# EAGLE board Battery Display Board (EAGLE 8.2.1)
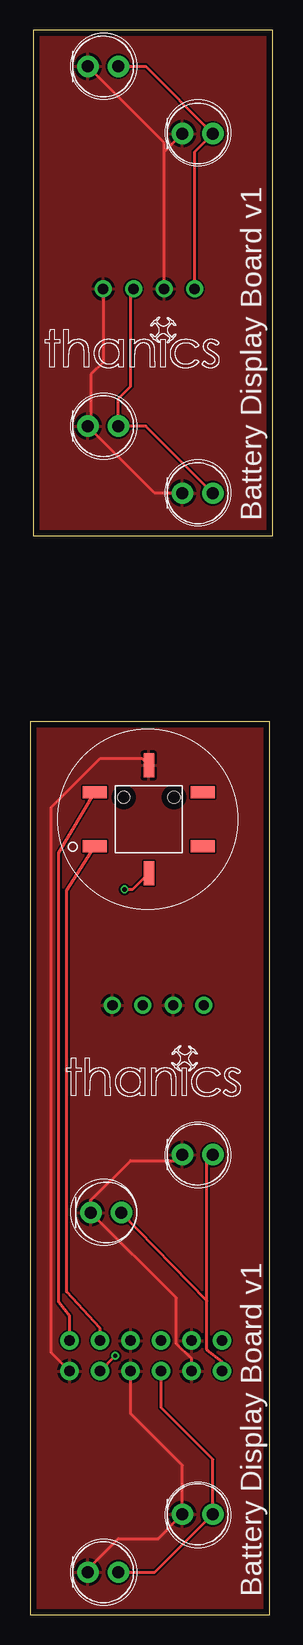
[diagram p0: board, top side]
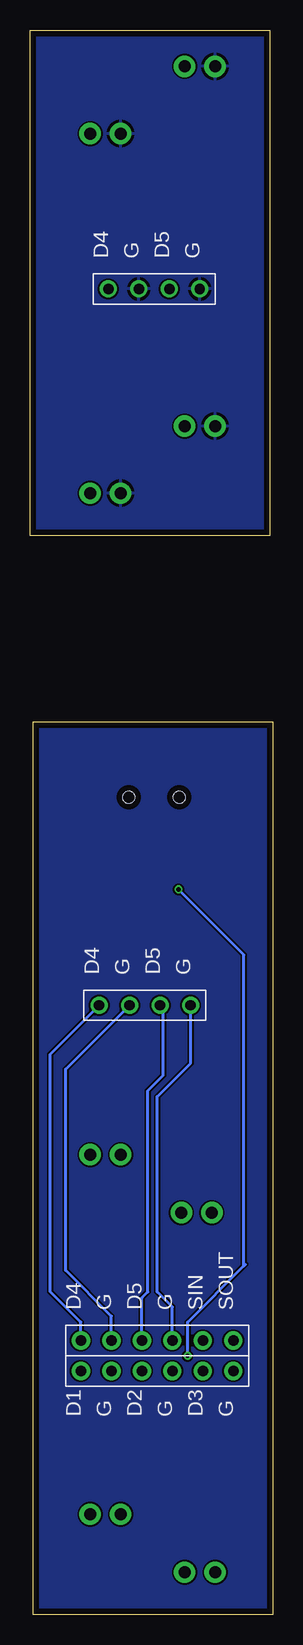
[diagram p1: board, bottom side, seen from below]

Size 20.24 x 132.07 mm. Coordinates in mm from the lower left corner, seen from the top.
Outline: 0,0 19.99,0 19.99,74.41 0,74.41 0,0
Outline: 0.25,89.92 20.24,89.92 20.24,132.07 0.25,132.07 0.25,89.92
Copper layers (1*16): Top 0.035mm / dielectric 1.6mm / Bottom 0.035mm
Design rules "Elecrow_2-layer_PCB_eagle_rule": minimum track width 6mil, minimum drill 12mil, track to track 6mil, track to pad 6mil, pad to pad 6mil, via to via 8mil, smd to smd 0mil, copper to edge 20mil, drill to drill 10mil, minimum pad ring 6mil, minimum via ring 6mil, stop-mask expansion 0mil, vias tented up to drill 100mil, thermal gap 10mil

## Footprints (pad centres in the part's own frame; a part is rotated, then mirrored left to right if it is on the bottom)
5MM_LED = drill 1 pad 1.778: A 1.27,0; C -1.27,0
LED_TACT_SWITCH = smd 1.999 x 1.001: 1 4.496,2.261; 2 -4.496,2.261; 3 4.496,-2.261; 4 -4.496,-2.261 | smd 0.889 x 1.999: 5 0,-4.496; 6 0,4.496 | hole 0.991: -2.095,-1.854; 2.095,-1.854
12_PIN_RIBBON_CONNECTOR = drill 0.87 pad 1.524: P$1 -1.27,6.35; P$2 -1.27,3.81; P$3 -1.27,1.27; P$4 -1.27,-1.27; P$5 -1.27,-3.81; P$6 -1.27,-6.35; P$7 1.27,6.35; P$8 1.27,3.81; P$9 1.27,1.27; P$10 1.27,-1.27; P$11 1.27,-3.81; P$12 1.27,-6.35
4_PIN_RIBBON_CONNECTOR = drill 0.87 pad 1.422: P$1 0,3.81; P$2 0,1.27; P$3 0,-1.27; P$4 0,-3.81

## Placement (x,y rotation side)
U$1  VAOL-5LSBY2_BLUE_LED  [5MM_LED]  6.35,33.53 0 top
U$2  LED_TACT_SWITCH  [LED_TACT_SWITCH]  9.91,66.29 180 top
U$3  VAOL-5LSBY2_BLUE_LED  [5MM_LED]  13.97,38.35 0 top
U$4  VAOL-5LSBY2_BLUE_LED  [5MM_LED]  13.97,8.38 0 top
U$5  VAOL-5LSBY2_BLUE_LED  [5MM_LED]  6.1,3.56 0 top
U$6  VAOL-5LSBY2_BLUE_LED  [5MM_LED]  6.1,129.03 0 top
U$7  VAOL-5LSBY2_BLUE_LED  [5MM_LED]  13.97,123.44 0 top
U$8  VAOL-5LSBY2_BLUE_LED  [5MM_LED]  13.97,93.47 0 top
U$9  VAOL-5LSBY2_BLUE_LED  [5MM_LED]  6.1,99.06 0 top
U$10  12_PIN_RIBBON_CONNECTOR  [12_PIN_RIBBON_CONNECTOR]  9.65,21.59 90 bottom
U$11  4_PIN_RIBBON_CONNECTOR  [4_PIN_RIBBON_CONNECTOR]  10.67,50.8 90 bottom
U$12  4_PIN_RIBBON_CONNECTOR  [4_PIN_RIBBON_CONNECTOR]  9.91,110.49 90 bottom

## Library data of the parts
U$1-U$12 = thanics_robotics

## Nets
GND: U$1.C U$2.5 U$3.C U$4.C U$5.C U$10.P$2 U$10.P$4 U$10.P$6 U$10.P$8 U$10.P$10 U$11.P$2 U$11.P$4
GND2: U$6.C U$7.C U$8.C U$9.C U$12.P$2 U$12.P$4
N$1: U$1.A U$3.A U$10.P$1
N$3: U$4.A U$5.A U$10.P$3
N$5: U$2.6 U$10.P$5
N$7: U$10.P$7 U$11.P$1
N$9: U$10.P$9 U$11.P$3
N$11: U$2.1 U$10.P$11
N$12: U$2.3 U$10.P$12
N$13: U$6.A U$7.A U$12.P$1
N$15: U$8.A U$9.A U$12.P$3

## Tracks (layer width: path | path; a pad name or v marks a point on that pad's centre or on a via)
GND
  Top 0.254: U$10.P$6 1.78,21.84 1.78,67.31 5.84,71.37 9.32,71.37 U$2.5 | U$5.C 4.83,3.81 7.37,6.35 10.67,6.35 U$4.C 12.7,12.45 8.38,16.76 U$10.P$4 | U$3.C 12.19,37.85 8.38,37.85 5.08,34.54 U$1.C 12.19,26.42 12.19,22.61 13.46,21.34 U$10.P$2
  Bottom 0.254: U$10.P$8 13.46,24.89 17.27,28.7 17.27,45.47 U$11.P$2 | U$10.P$10 8.38,25.65 9.65,26.92 9.65,43.18 6.86,45.97 U$11.P$4
  pour Top: 0.25,74.42 20.07,74.42 20.07,0.25 20.07,0 0,0 0,74.42
GND1
  pour Bottom: 0,74.42 20.07,74.42 20.07,0 0,0
GND2
  Top 0.254: U$12.P$2 11.18,121.92 | 11.18,121.92 U$7.C | 11.18,121.92 11.18,122.68 U$6.C | U$12.P$4 6.1,104.39 5.08,103.38 5.08,99.31 U$9.C 10.41,93.47 U$8.C
  pour Top: 0.25,132.08 20.32,132.08 20.32,89.92 0.25,89.92
  pour Bottom: 0.25,132.08 20.32,132.08 20.32,89.92 0.25,89.92
N$1
  Top 0.254: U$10.P$1 16,21.08 14.73,22.1 14.73,26.16 | 14.73,26.16 U$1.A | 14.73,26.16 14.73,38.1 U$3.A
N$3
  Top 0.254: U$5.A 10.41,3.56 U$4.A 15.24,12.95 10.92,17.27 U$10.P$3
N$5  (via drill 0.35)
  Top 0.254: U$10.P$5 v7.11,21.59 | v7.87,60.45 8.56,60.45 U$2.6
  Bottom 0.254: v7.11,21.59 7.11,24.38 2.41,29.08 | 2.41,29.08 2.29,29.21 | 2.41,29.08 2.41,54.99 v7.87,60.45
N$7
  Bottom 0.254: U$10.P$7 16,24.38 18.54,26.92 18.54,46.74 U$11.P$1
N$9
  Bottom 0.254: U$10.P$9 10.92,26.42 10.41,26.92 10.41,43.69 9.14,44.96 9.14,50.55 U$11.P$3
N$11
  Top 0.254: U$10.P$11 5.84,23.88 3.05,26.92 3.05,60.4 U$2.1
N$12
  Top 0.254: U$10.P$12 3.3,24.89 2.41,26.04 2.41,63.53 U$2.3
N$13
  Top 0.254: U$12.P$1 13.72,121.92 U$7.A 9.65,129.03 U$6.A
N$15
  Top 0.254: U$12.P$3 8.38,110.24 8.38,102.36 7.37,101.35 U$9.A 9.65,99.06 U$8.A

## Text on the board
tNames: Battery Display Board v1 | Battery Display Board v1